# Altium PCB PCB_BLU.PcbDoc
Units mm, origin at the board's own origin, x right, y up, seen from the top; angles counter-clockwise.
Board outline 32.18 x 84.97 mm, 2 copper layers (Top, Bottom); 74 components, 57 nets, 307 pads, 0 vias.
Unrouted connection lines stored in the file: 171.
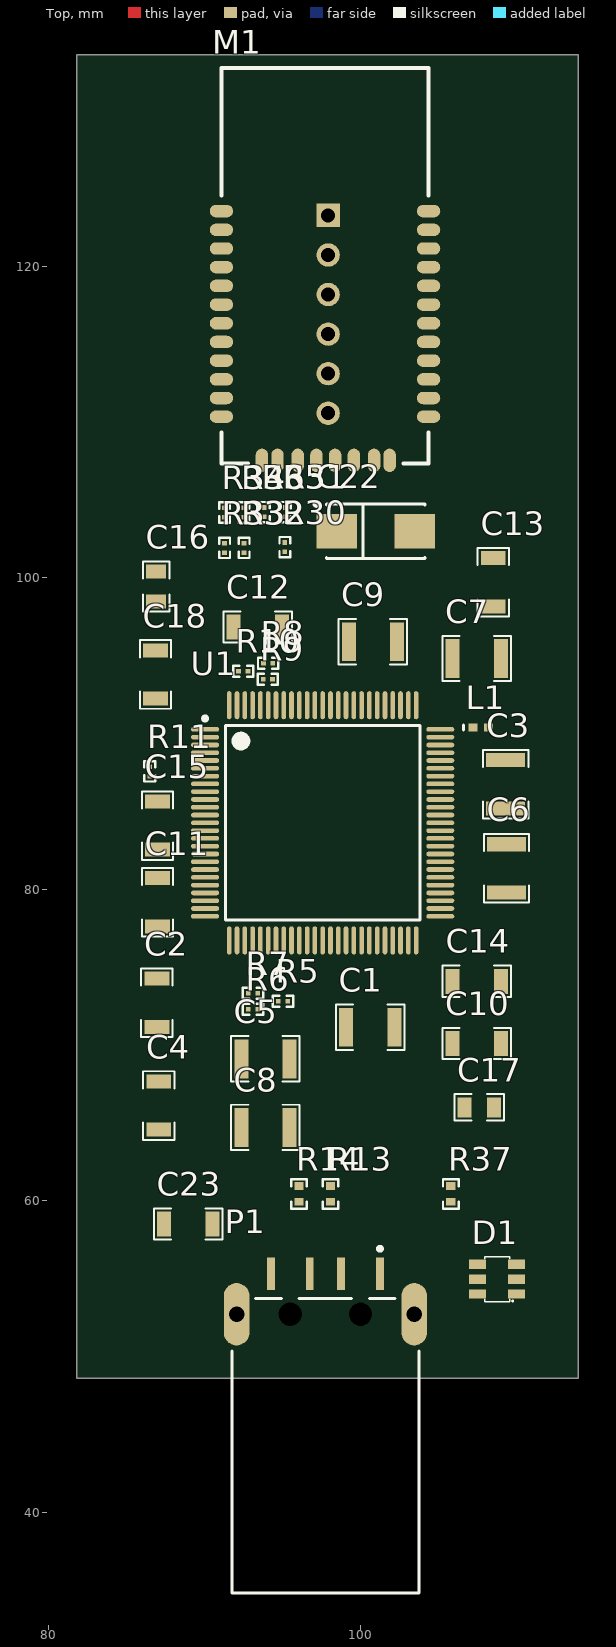
[diagram p0: Top view]
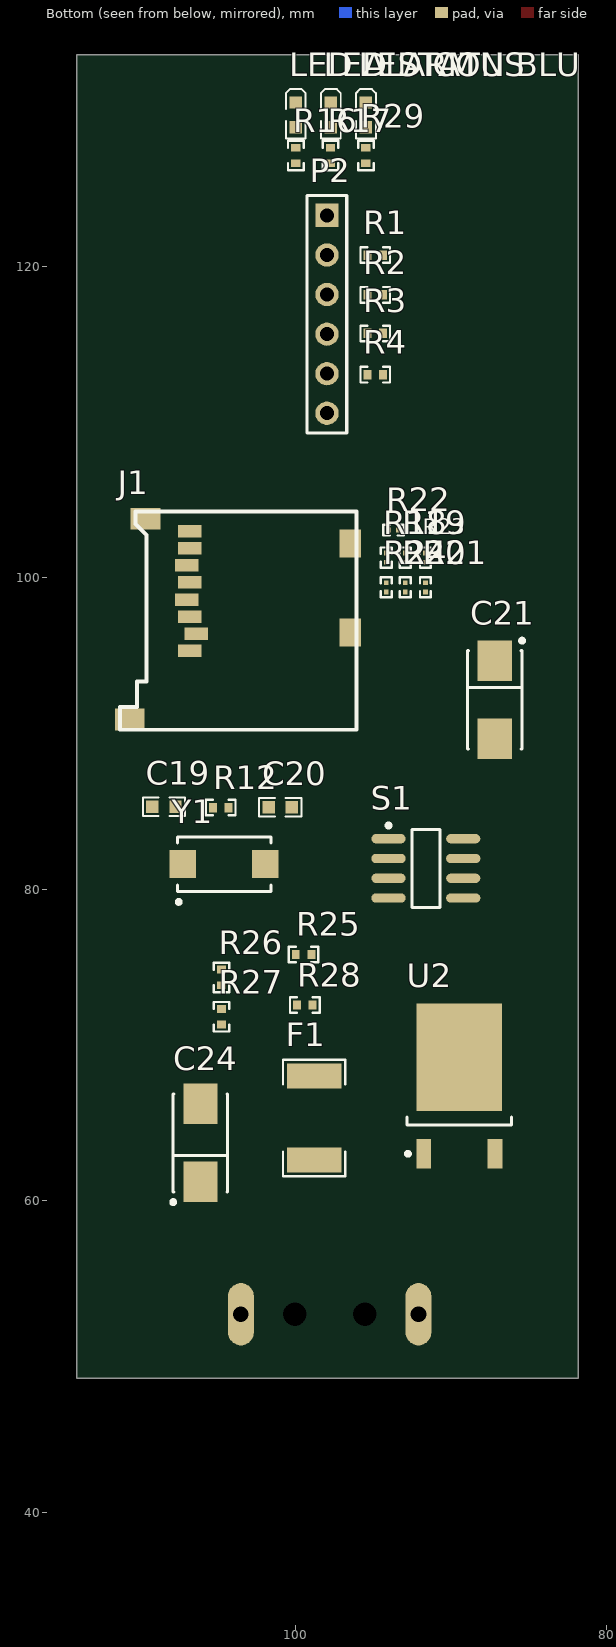
[diagram p1: Bottom view, seen from below]

## Layer stack, top to bottom
Top Solder: solder mask 0.0102, Solder Resist, Dk 3.5
Top: signal copper 0.0356
Dielectric 1: dielectric 0.32, FR-4, Dk 4.8
Bottom: signal copper 0.0356
Bottom Solder: solder mask 0.0102, Solder Resist, Dk 3.5

## Board outline
81.825,48.6 81.825,133.575 114,133.575 114,48.6

## Design rules (kind name [scope] priority, off if disabled: settings)
Clearance Clearance_U1_0.1mm [(ObjectKind = 'Pad') And (Component = 'U1')] p1: gap=0.1
Clearance Clearance_ALL [All] p2: gap=0.15
PolygonConnect [All] p1: connectstyle=Relief reliefconductorwidth=0.254 reliefentries=4 polygonreliefangle="90 Angle" airgapwidth=0.254
RoomDefinition PCB_BLU [InComponentClass('PCB_BLU')] p1: confinementstyle=ConfineIn formatcopy=TRUE lockcomponents=FALSE outline 0,0 50.8,0 50.8,25.4 0,25.4
RoomDefinition PCB_BLU3 [InComponentClass('PCB_BLU3')] p2: confinementstyle=ConfineIn formatcopy=TRUE lockcomponents=FALSE outline 0,0 50.8,0 50.8,25.4 0,25.4
RoomDefinition PCB_BLU2 [InComponentClass('PCB_BLU2')] p3: confinementstyle=ConfineIn formatcopy=TRUE lockcomponents=FALSE outline 0,0 50.8,0 50.8,25.4 0,25.4
RoomDefinition PCB_BLU1 [InComponentClass('PCB_BLU1')] p4: confinementstyle=ConfineIn formatcopy=TRUE lockcomponents=FALSE outline 0,0 50.8,0 50.8,25.4 0,25.4
RoutingVias [All] p1: holewidth=0.711 width=1.27 viastyle="Through Hole" minholewidth=0.711 minwidth=1.27 maxholewidth=0.711 maxwidth=1.27
SMDNeckDown [All] p1: percent=90.000
SolderMaskExpansion [All] p1: expansion=0.102
Width "Schematic Width Constraint_1" [InNet('NetC1_1')] p1: maxlimit=0.005 minlimit=0.003 preferedwidth=0.005
Width "Schematic Width Constraint" [InNet('GND')] p2: maxlimit=0.005 minlimit=0.003 preferedwidth=0.005
Width Width_GND_0.5mm [InNet('GND')] p3: maxlimit=0.5 minlimit=0.254 preferedwidth=0.5
Width Width_3.3_0.5mm [InNet('VDD')] p4: maxlimit=0.5 minlimit=0.254 preferedwidth=0.5
Width Width_5V_0.5mm [InNet('VUSB')] p5: maxlimit=0.5 minlimit=0.254 preferedwidth=0.5
Width [All] p6: maxlimit=0.2 minlimit=0.2 preferedwidth=0.2
30 further rules are at their usual default settings.

## Classes and differential pairs
component class PCB_BLU: C1 C2 C3 C4 C5 C6 C7 C8 C9 C10 C11 C12 C13 C14 C15 C16 C17 C18 C19 C20 L1 "LED ALARM" "LED STATUS" P2 R1 R2 R3 R4 R5 R6 R7 R8 R9 R10 R11 R12 R16 R17 U1 Y1
component class PCB_BLU3: C23 C24 D1 F1 P1 R13 R14 R37 U2
component class PCB_BLU2: C22 "LED CON BLU" M1 R25 R26 R27 R28 R29 R30 R31 R32 R33 R34 R35 R36 S1
component class PCB_BLU1: C21 J1 R18 R19 R20 R21 R22 R23 R24

## Components (designator, comment, footprint, x,y, rotation, side; value= is the part's Value field where it differs from the comment)
C1 "1μF" "WCAP-CSGP 1210, H=1.25mm" 100.65,71.15 r180 top
C2 "100 nF" "WCAP-CSGP 1206, H=0.8mm" 86.95,72.725 r270 top
C3 "1μF" "WCAP-CSGP 1210, H=1.25mm" 109.35,86.75 r90 top
C4 "100 nF" "WCAP-CSGP 1206, H=0.8mm" 87.075,66.125 r90 top
C5 "1μF" "WCAP-CSGP 1210, H=1.25mm" 93.925,69.125 r0 top
C6 "1μF" "WCAP-CSGP 1210, H=1.25mm" 109.4,81.35 r90 top
C7 "1μF" "WCAP-CSGP 1210, H=1.25mm" 107.5,94.825 r0 top
C8 "1μF" "WCAP-CSGP 1210, H=1.25mm" 93.925,64.725 r0 top
C9 "1μF" "WCAP-CSGP 1210, H=1.25mm" 100.825,95.9 r0 top
C10 "100 nF" "WCAP-CSGP 1206, H=0.8mm" 107.5,70.1 r0 top
C11 "100 nF" "WCAP-CSGP 1206, H=0.8mm" 87,79.175 r90 top
C12 "100 nF" "WCAP-CSGP 1206, H=0.8mm" 93.425,96.85 r0 top
C13 "100 nF" "WCAP-CSGP 1206, H=0.8mm" 108.55,99.725 r90 top
C14 "100 nF" "WCAP-CSGP 1206, H=0.8mm" 107.5,74.1 r180 top
C15 "100 nF" "WCAP-CSGP 1206, H=0.8mm" 87,84.1 r90 top
C16 "2.2μF" "WCAP-CSGP 0805, H=1.25mm" 86.9,99.45 r90 top
C17 "2.2μF" "WCAP-CSGP 0805, H=1.25mm" 107.65,66 r0 top
C18 "100 nF" "WCAP-CSGP 1206, H=0.8mm" 86.875,93.8 r90 top
C19 "20 pF" "WCAP-CSGP 0603, H=0.8mm" 108.425,85.3 r0 bottom
C20 "20 pF" "WCAP-CSGP 0603, H=0.8mm" 100.95,85.275 r0 bottom
C21 "22uF" 6032 87.175,92.175 r270 bottom
C22 "22uF" 6032 101,103 r0 top
C23 "100 nF" "WCAP-CSGP 1206, H=0.8mm" 88.975,58.525 r0 top
C24 "22uF" 6032 106.075,63.725 r90 bottom
D1 "VDC = 5V" SOT23-6L 108.8,54.975 r90 top
F1 "300mA" RES2512R 98.775,65.325 r270 bottom
J1 "MICROSD" MICROSD 96.05,104.25 r90 bottom
L1 "Inductor" 0402-A 107.75,90.4 r0 top
"LED ALARM" "150060RS75000" LED_0603_Red 99.95,129.725 r90 bottom
"LED CON BLU" "150060BS75000" LED_0603_Blue 95.45,129.725 r90 bottom
"LED STATUS" "150060GS75000" LED_0603_Green 97.7,129.725 r90 bottom
M1 "RN42 Module" RN42-LAND 91.1,107.35 r0 top
P1 "1470695-4" 1470695A 97.775,50.025 r270 top
P2 "SWD" HDR1X6 97.95,123.275 r270 bottom
R1 "22" RES0402R 94.85,120.725 r180 bottom
R2 "22" RES0402R 94.85,118.175 r180 bottom
R3 "22" RES0402R 94.85,115.7 r180 bottom
R4 "22" RES0402R 94.85,113.05 r0 bottom
R5 "10k" RES0201R 95.05,72.825 r0 top
R6 "510" RES0201R 93.125,72.3 r0 top
R7 "0" RES0201R 93.125,73.325 r180 top
R8 "10k" RES0201R 94.1,94.525 r180 top
R9 "510" RES0201R 94.075,93.5 r0 top
R10 "0" RES0201R 92.5,94 r0 top
R11 "100k" RES0201R 86.5,87.575 r90 top
R12 "220" RES0402R 104.775,85.25 r180 bottom
R13 "22" RES0402R 98.1,60.45 r90 top
R14 "22" RES0402R 96.075,60.45 r90 top
R16 "510" RES0402R 99.95,127.125 r90 bottom
R17 "510" RES0402R 97.725,127.125 r90 bottom
R18 "100kOm" RES0201R 94.15,101.3 r270 bottom
R19 "100kOm" RES0201R 92.925,101.3 r270 bottom
R20 "100kOm" RES0201R 92.925,99.4 r270 bottom
R21 "100kOm" RES0201R 91.625,99.4 r270 bottom
R22 "100kOm" RES0201R 93.675,103.075 r0 bottom
R23 "100kOm" RES0201R 91.625,101.3 r270 bottom
R24 "100kOm" RES0201R 94.15,99.4 r270 bottom
R25 "100k" RES0402R 99.45,75.825 r0 bottom
R26 "100k" RES0402R 104.725,74.35 r90 bottom
R27 "100k" RES0402R 104.725,71.825 r90 bottom
R28 "100k" RES0402R 99.375,72.575 r180 bottom
R29 "510" RES0402R 95.45,127.125 r90 bottom
R30 "100k" RES0201R 95.175,101.975 r90 top
R31 "100k" RES0201R 95.2,104.225 r90 top
R32 "100k" RES0201R 92.55,101.925 r90 top
R33 "100k" RES0201R 91.3,101.925 r90 top
R34 "510" RES0201R 91.3,104.2 r90 top
R35 "510" RES0201R 93.85,104.225 r90 top
R36 "100k" RES0201R 92.55,104.2 r90 top
R37 "22" RES0402R 105.825,60.45 r90 top
S1 "SW DIP-4" SO8_N 91.6,81.35 r180 bottom
U1 "STM32F407VGT6" STM-LQFP100_N 97.6,84.275 r0 top
U2 "LP38690DTX-3.3" TD03B_N 89.45,67.375 r90 bottom
Y1 "8 Mhz" 3SMXA 104.55,81.625 r180 bottom

## Footprints (in the part's own frame and the unit in brackets; to place one, negate y for a bottom-side part, rotate by r counter-clockwise, add the part's x,y. Pads: shape width x height; smd on the part's side, far side on the other; paste and mask are expansions set on the pad)
3SMXA [mm] "Quartz Crystal, SM; Body 6.2 x 3.7 mm (LxW max)"
  rect 1.7x1.8 smd: 1(-2.65,0) 2(2.65,0)
  silkscreen extent -3.04,-2.55 3,1.75, body extent -2.7,-1.4 2.7,1.4, height 1.3
0402-A [mm] "Chip Inductor, Body 1.0x0.5mm, IPC High Density"
  rect 0.6x0.5 smd: 1(-0.5,0) 2(0.5,0)
  silkscreen extent -1.1,-0.15 -1.1,0.15, body extent -0.55,-0.3 0.55,0.3, height 0.55
6032 [mm] "Capacitor, SM Tantalum; Body 6.0 x 3.2 mm (LxW typ)"
  rect 2.6x2.2 smd: 1(-2.5,0) 2(2.5,0)
  silkscreen extent -3.92,-1.75 3.15,1.87, body extent -3,-1.47 3,1.73, height 2.51
1470695A [mm] "Connector; USB1.1, Type A, SM; 4 Position; Right Angle"
  rect 2.1x0.5 smd: 1(-5.3,3.5) 2(-5.3,1) 3(-5.3,-1) 4(-5.3,-3.5)
  oval 4x1.65 hole 1: 5(-2.7,-5.7) 6(-2.7,5.7)
  round 1.2 hole 1.5 unplated: MH1(-2.7,-2.25) MH2(-2.7,2.25)
  silkscreen extent -7.02,-6 15.2,6, body extent -6.1,-6.3 14.2,6.3, height 3.15
HDR1X6 [mm]
  rect 1.5x1.5 hole 0.9: 1(0,0)
  round 1.5 hole 0.9: 2(2.54,0) 3(5.08,0) 4(7.62,0) 5(10.16,0) 6(12.7,0)
  silkscreen extent -1.27,-1.27 13.97,1.27, body extent -1.29,-1.26 13.95,1.15, height 8.18
LED_0603_Blue [mm] "Chip LED, 2-Leads, Body 1.6x0.8mm, IPC Medium Density"
  rect 0.8x0.8 smd: 1(-0.8,0) 2(0.8,0)
  silkscreen extent -1.52,-0.64 1.65,0.64, body extent -0.8,-0.4 0.8,0.4, height 0.7
LED_0603_Green [mm] "Chip LED, 2-Leads, Body 1.6x0.8mm, IPC Medium Density"
  rect 0.8x0.8 smd: 1(-0.8,0) 2(0.8,0)
  silkscreen extent -1.52,-0.64 1.65,0.63, body extent -0.8,-0.4 0.8,0.4, height 0.7
LED_0603_Red [mm] "Chip LED, 2-Leads, Body 1.6x0.8mm, IPC Medium Density"
  rect 0.8x0.8 smd: 1(-0.8,0) 2(0.8,0)
  silkscreen extent -1.52,-0.63 1.65,0.64, body extent -0.8,-0.4 0.8,0.4, height 0.7
MICROSD [mm]
  rect 0.8x1.5 smd: 1(-8.94,10.7) 2(-7.84,10.3) 3(-6.74,10.7) 4(-5.64,10.9) 5(-4.54,10.7) 6(-3.44,10.9) 7(-2.34,10.7) 8(-1.24,10.7)
  rect 1.4x1.9 smd: 9(-13.35,14.55) 9(-0.45,13.55)
  rect 1.8x1.4 smd: 10(-7.75,0.4) 10(-2.05,0.4)
  silkscreen extent -14,0 0,15.2, body extent -14.05,0 0.05,15.2, height 1.85
RES0201R [mm] "resistor 0201 reflow soldering"
  rect 0.3x0.3 smd paste+0 mask+0.075: 1(-0.3,0) 2(0.3,0)
  silkscreen extent -0.65,-0.35 0.65,0.35, body extent -0.3,-0.15 0.3,0.15, height 0.3
RES0402R [mm] "resistor 0402 reflow soldering"
  rect 0.5x0.6 smd: 1(-0.5,0) 2(0.5,0)
  silkscreen extent -0.95,-0.5 0.95,0.5, body extent -0.5,-0.25 0.5,0.25, height 0.3
RES2512R [mm] "resistor 2512 reflow soldering"
  rect 1.6x3.5 smd: 1(-2.7,0) 2(2.7,0)
  silkscreen extent -3.75,-2 3.75,2, body extent -3.15,-1.55 3.15,1.55, height 0.55
RN42-LAND [mm] "RN42 Footprint"
  oval 1.5x0.8 smd: 1(0,16.2) 2(0,15) 3(0,13.8) 4(0,12.6) 5(0,11.4) 6(0,10.2) 7(0,9) 8(0,7.8) 9(0,6.6) 10(0,5.4) 11(0,4.2) 12(0,3) 13(13.3,3) 14(13.3,4.2) 15(13.3,5.4) 16(13.3,6.6) 17(13.3,7.8) 18(13.3,9) 19(13.3,10.2) 20(13.3,11.4) 21(13.3,12.6) 22(13.3,13.8) 23(13.3,15) 24(13.3,16.2)
  oval 0.8x1.5 smd: 28(9.8,0.2) 29(3.6,0.2) 30(10.8,0.2) 31(8.5,0.2) 32(7.3,0.2) 33(6.1,0.2) 34(4.9,0.2) 35(2.6,0.2)
  silkscreen extent 0,0 13.3,25.4, body extent 0.05,-0.27 13.25,25.53, height 2.1
SO8_N [mm] "SOIC, 8-Leads, Body 4.9x3.9mm, Pitch 1.27mm, IPC Medium Density"
  oval 2.2x0.6 smd: 1(-2.4,1.905) 2(-2.4,0.635) 3(-2.4,-0.635) 4(-2.4,-1.905) 5(2.4,-1.905) 6(2.4,-0.635) 7(2.4,0.635) 8(2.4,1.905)
  silkscreen extent -2.53,-2.5 0.9,2.88, body extent -2,-2.5 2,2.5, height 1.75
SOT23-6L [mm] "WE-TVS TVS Diode, Body 2.9*2.8mm, 6 leads"
  rect 0.6x1.1 smd: 1(-0.95,-1.25) 2(0,-1.25) 3(0.95,-1.25) 4(0.95,1.25) 5(0,1.25) 6(-0.95,1.25)
  silkscreen extent -1.45,-1.03 1.45,0.8, body extent -1.45,-1.4 1.45,1.4, height 1.12
STM-LQFP100_N [mm] "Thin QFP, 100-Leads, Body 14x14mm, Pitch 0.5mm, IPC Medium Density"
  oval 1.8x0.3 smd: 1(-7.55,6) 2(-7.55,5.5) 3(-7.55,5) 4(-7.55,4.5) 5(-7.55,4) 6(-7.55,3.5) 7(-7.55,3) 8(-7.55,2.5) 9(-7.55,2) 10(-7.55,1.5) 11(-7.55,1) 12(-7.55,0.5) 13(-7.55,0) 14(-7.55,-0.5) 15(-7.55,-1) 16(-7.55,-1.5) 17(-7.55,-2) 18(-7.55,-2.5) 19(-7.55,-3) 20(-7.55,-3.5) 21(-7.55,-4) 22(-7.55,-4.5) 23(-7.55,-5) 24(-7.55,-5.5) 25(-7.55,-6) 51(7.55,-6) 52(7.55,-5.5) 53(7.55,-5) 54(7.55,-4.5) 55(7.55,-4) 56(7.55,-3.5) 57(7.55,-3) 58(7.55,-2.5) 59(7.55,-2) 60(7.55,-1.5) 61(7.55,-1) 62(7.55,-0.5) 63(7.55,0) 64(7.55,0.5) 65(7.55,1) 66(7.55,1.5) 67(7.55,2) 68(7.55,2.5) 69(7.55,3) 70(7.55,3.5) 71(7.55,4) 72(7.55,4.5) 73(7.55,5) 74(7.55,5.5) 75(7.55,6)
  oval 0.3x1.8 smd: 26(-6,-7.55) 27(-5.5,-7.55) 28(-5,-7.55) 29(-4.5,-7.55) 30(-4,-7.55) 31(-3.5,-7.55) 32(-3,-7.55) 33(-2.5,-7.55) 34(-2,-7.55) 35(-1.5,-7.55) 36(-1,-7.55) 37(-0.5,-7.55) 38(0,-7.55) 39(0.5,-7.55) 40(1,-7.55) 41(1.5,-7.55) 42(2,-7.55) 43(2.5,-7.55) 44(3,-7.55) 45(3.5,-7.55) 46(4,-7.55) 47(4.5,-7.55) 48(5,-7.55) 49(5.5,-7.55) 50(6,-7.55) 76(6,7.55) 77(5.5,7.55) 78(5,7.55) 79(4.5,7.55) 80(4,7.55) 81(3.5,7.55) 82(3,7.55) 83(2.5,7.55) 84(2,7.55) 85(1.5,7.55) 86(1,7.55) 87(0.5,7.55) 88(0,7.55) 89(-0.5,7.55) 90(-1,7.55) 91(-1.5,7.55) 92(-2,7.55) 93(-2.5,7.55) 94(-3,7.55) 95(-3.5,7.55) 96(-4,7.55) 97(-4.5,7.55) 98(-5,7.55) 99(-5.5,7.55) 100(-6,7.55)
  silkscreen extent -7.67,-6.25 6.25,6.82, body extent -7,-7 7,7, height 1.6
TD03B_N [mm] "D-PAK, 4-Leads, Body 6.1x6.6mm, Pitch 2.29mm, Lead Span 9.7mm, IPC Medium Density"
  rect 1.9x0.95 smd: 1(-4.35,2.28) 3(-4.35,-2.28)
  rect 6.9x5.5 smd: 4(1.85,0)
  silkscreen extent -4.47,-3.35 -2,3.43, body extent -2.5,-3.35 3.7,3.35, height 2.38
"WCAP-CSGP 0603, H=0.8mm" [mm] "MLCC 0603, H=0.8mm"
  rect 0.8x0.8 smd: 1(-0.75,0) 2(0.75,0)
  silkscreen extent -1.35,-0.6 1.35,0.6, body extent -0.8,-0.4 0.8,0.4, height 0.77
"WCAP-CSGP 0805, H=1.25mm" [mm] "MLCC 0805, H=1.25mm"
  rect 0.9x1.3 smd: 1(-0.95,0) 2(0.95,0)
  silkscreen extent -1.6,-0.85 1.6,0.85, body extent -1,-0.63 1,0.62, height 1.22
"WCAP-CSGP 1206, H=0.8mm" [mm] "MLCC 1206, H=0.8mm"
  rect 0.9x1.6 smd: 1(-1.55,0) 2(1.55,0)
  silkscreen extent -2.2,-1 2.2,1, body extent -1.61,-0.8 1.59,0.8, height 0.8
"WCAP-CSGP 1210, H=1.25mm" [mm] "MLCC 1210, H=0.95mm"
  rect 0.9x2.5 smd: 1(-1.55,0) 2(1.55,0)
  silkscreen extent -2.2,-1.45 2.2,1.45, body extent -1.62,-1.25 1.58,1.25, height 2

## Part data
C1 C3 C5 C6 C7 C8 C9: library part "WCAP-CSGP 1210, 885012209011", "WCAP-CSGP MLCC, X7R, 1210, 1?F pF,16Vdc"
C2 C4 C10 C11 C12 C13 C14 C15 C18 C23: library part "WCAP-CSGP 1206, 885012208009", "WCAP-CSGP MLCC, X7R, 1206, 100000 pF,10Vdc"
C16 C17: library part "WCAP-CSGP 0805, 885012207024", "WCAP-CSGP MLCC, X7R, 0805, 2.2?F ,10Vdc"
C19 C20: library part "WCAP-CSGP 0603, 885012006004", "WCAP-CSGP MLCC, NP0, 0603, 22 pF,10Vdc"
C21 C22 C24: library part CWR11DH226M, "Tantamount Military, Surface Mount MIL-PRF-55365/8 Qualified Solid Tantalum Chip Capacitor: 22uF, 20% Tolerance, 6 WVDC @ +85°C, Surge = 8V"
D1: library part "WE-TVS, SOT23-6L, 824015", "WE-TVS TVS Diode, High Speed Series, SOT23-6L, VDC = 5V"
F1: library part "Fuse 1", "Fuse"
J1: "=Description"
"LED ALARM": library part "WL-SMCW 0603  150060RS75000", "SMD mono-color Chip LED, WL-SMCW, Red"
"LED CON BLU": library part "WL-SMCW 0603  150060BS75000", "SMD mono-color Chip LED, WL-SMCW, Blue"
"LED STATUS": library part "WL-SMCW 0603  150060GS75000", "SMD mono-color Chip LED, WL-SMCW, Green"
M1: library part RN42MOD
P1: "USB 1.1, Right Angle, SMT, A Type, Plug, 4 Position, Black"
P2: library part "Header 6", "Header, 6-Pin"
R1 R2 R3 R4 R5 R6 R7 R8 R9 R10 R11 R12 R13 R14 R16 R17 R18 R19 R20 R21 R22 R23 R24 R25 R26 R27 R28 R29 R30 R31 R32 R33 R34 R35 R36 R37: library part Resistor1, "Resistor"
S1: "DIP Switch, 4 Position, SPST"
U1: "ARM Cortex-M4 32-bit MCU+FPU, 210 DMIPS, 1024 kB Flash, 192 kB Internal RAM, 82 I/Os, 100-pin LQFP, -40 to 85 degC, Tray"
U2: "1A Low Dropout CMOS Linear Regulators Stable with Ceramic Output Capacitors, 3-pin TO-252"
Y1: library part XTAL, "Crystal Oscillator"

## Nets (pads, with @x,y where several pads share a name; then routed paths per layer and width w, separated by ;. In a path a pad name is that pad's centre, name@x,y a point inside that pad or via, vN(x,y) a via of type N, cw(c..) or ccw(c..) an arc to the next point about the centre after c; other vN are vias at no path point)
GND: C1.2 C2.2 C3.1 C4.1 C5.1 C6.1 C7.1 C8.1 C9.1 C10.1 C11.1 C12.1 C13.1 C14.1 C15.1 C16.2 C17.2 C18.1 C19.1 C20.1 C21.2 C22.2 C23.1 C24.2 D1.2 J1.6 M1.1 M1.12 M1.28 M1.29 P1.4 P1.5 P1.6 P2.6 R7.1 R10.1 R16.1 R17.1 R29.2 R30.2 R31.2 R32.1 R33.1 U1.10 U1.20 U1.27 U1.74 U1.99 U2.4
NetC1_1: C1.1 C2.1 C3.2 C4.2 L1.1 U1.21 U1.22
NetC16_1: C16.1 U1.49
NetC17_1: C17.1 U1.73
NetC18_2: C18.2 R4.2 R11.2 U1.14
NetC19_2: C19.2 R12.1 Y1.1
NetC20_2: C20.2 U1.12 Y1.2
NetD1_1: D1.1 P1.2 R13.1
NetD1_3: D1.3 P1.3 R14.1
NetD1_4: D1.4 R14.2 U1.71
NetD1_6: D1.6 R13.2 U1.70
NetF1_2: F1.2 P1.1
NetJ1_1: J1.1 R20.1 U1.78
NetJ1_2: J1.2 R21.1 U1.79
NetJ1_3: J1.3 R22.1 U1.83
NetJ1_5: J1.5 R23.1 U1.80
NetJ1_7: J1.7 R18.1 U1.65
NetJ1_8: J1.8 R19.1 U1.66
NetJ1_10: J1.10 R24.2 U1.63
"NetLED ALARM_1": "LED ALARM.1" U1.59
"NetLED ALARM_2": "LED ALARM.2" R16.2
"NetLED CON BLU_1": "LED CON BLU.1" M1.21
"NetLED CON BLU_2": "LED CON BLU.2" R29.1
"NetLED STATUS_1": "LED STATUS.1" U1.60
"NetLED STATUS_2": "LED STATUS.2" R17.2
NetM1_2: M1.2 R30.1
NetM1_3: M1.3 S1.6
NetM1_4: M1.4 S1.5
NetM1_5: M1.5 U1.34
NetM1_6: M1.6 R31.1
NetM1_13: M1.13 R35.2
NetM1_14: M1.14 R34.2
NetM1_16: M1.16 R33.2
NetM1_20: M1.20 S1.8
NetM1_22: M1.22 S1.7
NetM1_23: M1.23 R32.2
NetP2_2: P2.2 R1.1
NetP2_3: P2.3 R2.1
NetP2_4: P2.4 R3.1
NetP2_5: P2.5 R4.1
NetR1_2: R1.2 U1.76
NetR2_2: R2.2 U1.72
NetR3_2: R3.2 U1.89
NetR5_1: R5.1 R6.2 U1.37
NetR6_1: R6.1 R7.2
NetR8_1: R8.1 R9.2 U1.94
NetR9_1: R9.1 R10.2
NetR12_2: R12.2 U1.13
NetR25_1: R25.1 S1.1
NetR26_1: R26.1 S1.2
NetR27_1: R27.1 S1.3
NetR28_1: R28.1 S1.4
NetR34_1: R34.1 U1.48
NetR35_1: R35.1 R36.2 U1.47
NetR37_2: R37.2 U1.68 U1.69
VDD: C5.2 C6.2 C7.2 C8.2 C9.2 C10.2 C11.2 C12.2 C13.2 C14.2 C15.2 C21.1 C22.1 C23.2 J1.4 L1.2 M1.11 P2.1 R5.2 R8.2 R11.1 R18.2 R19.2 R20.2 R21.2 R22.2 R23.2 R24.1 R25.2 R26.2 R27.2 R28.2 R36.1 U1.6 U1.11 U1.19 U1.28 U1.50 U1.75 U1.100 U2.1
VUSB: C24.1 D1.5 F1.1 R37.1 U2.3
pads on no net: J1.9 M1.7 M1.8 M1.9 M1.10 M1.15 M1.17 M1.18 M1.19 M1.24 M1.30 M1.31 M1.32 M1.33 M1.34 M1.35 P1.MH1 P1.MH2 U1.1 U1.2 U1.3 U1.4 U1.5 U1.7 U1.8 U1.9 U1.15 U1.16 U1.17 U1.18 U1.23 U1.24 U1.25 U1.26 U1.29 U1.30 U1.31 U1.32 U1.33 U1.35 U1.36 U1.38 U1.39 U1.40 U1.41 U1.42 U1.43 U1.44 U1.45 U1.46 U1.51 U1.52 U1.53 U1.54 U1.55 U1.56 U1.57 U1.58 U1.61 U1.62 U1.64 U1.67 U1.77 U1.81 U1.82 U1.84 U1.85 U1.86 U1.87 U1.88 U1.90 U1.91 U1.92 U1.93 U1.95 U1.96 U1.97 U1.98

## Silkscreen, mask and mechanical layers (free items; w line width, h text height)
Board:
  the board outline again, w0.5

## Text inside footprints (layer, text, board x,y; h text height)
P1: Board "PCB Edge" at 92.602,49.552 h0.25; Board "Alert PCB fab to slot details" at 105.951,51.025 h0.3 r270; Board "Slot 1x2.5mm, PTH" at 105.451,51.025 h0.3 r270; Board "Assign keep-out area to slot" at 106.451,51.025 h0.3 r270; Board "Mech 1 - Slot cut-out" at 104.951,51.025 h0.3 r270; Board "Mech 2 - Clearance, move to internal plane if present" at 104.451,51.025 h0.3 r270